# Altium PCB 12V SMPS.PcbDoc
Units mm, origin at the board's own origin, x right, y up, seen from the top; angles counter-clockwise.
Board outline 89 x 44 mm, 2 copper layers (Top Layer, Bottom Layer); 10 components, 8 nets, 28 pads, 0 vias.
Unrouted connection lines stored in the file: 19.
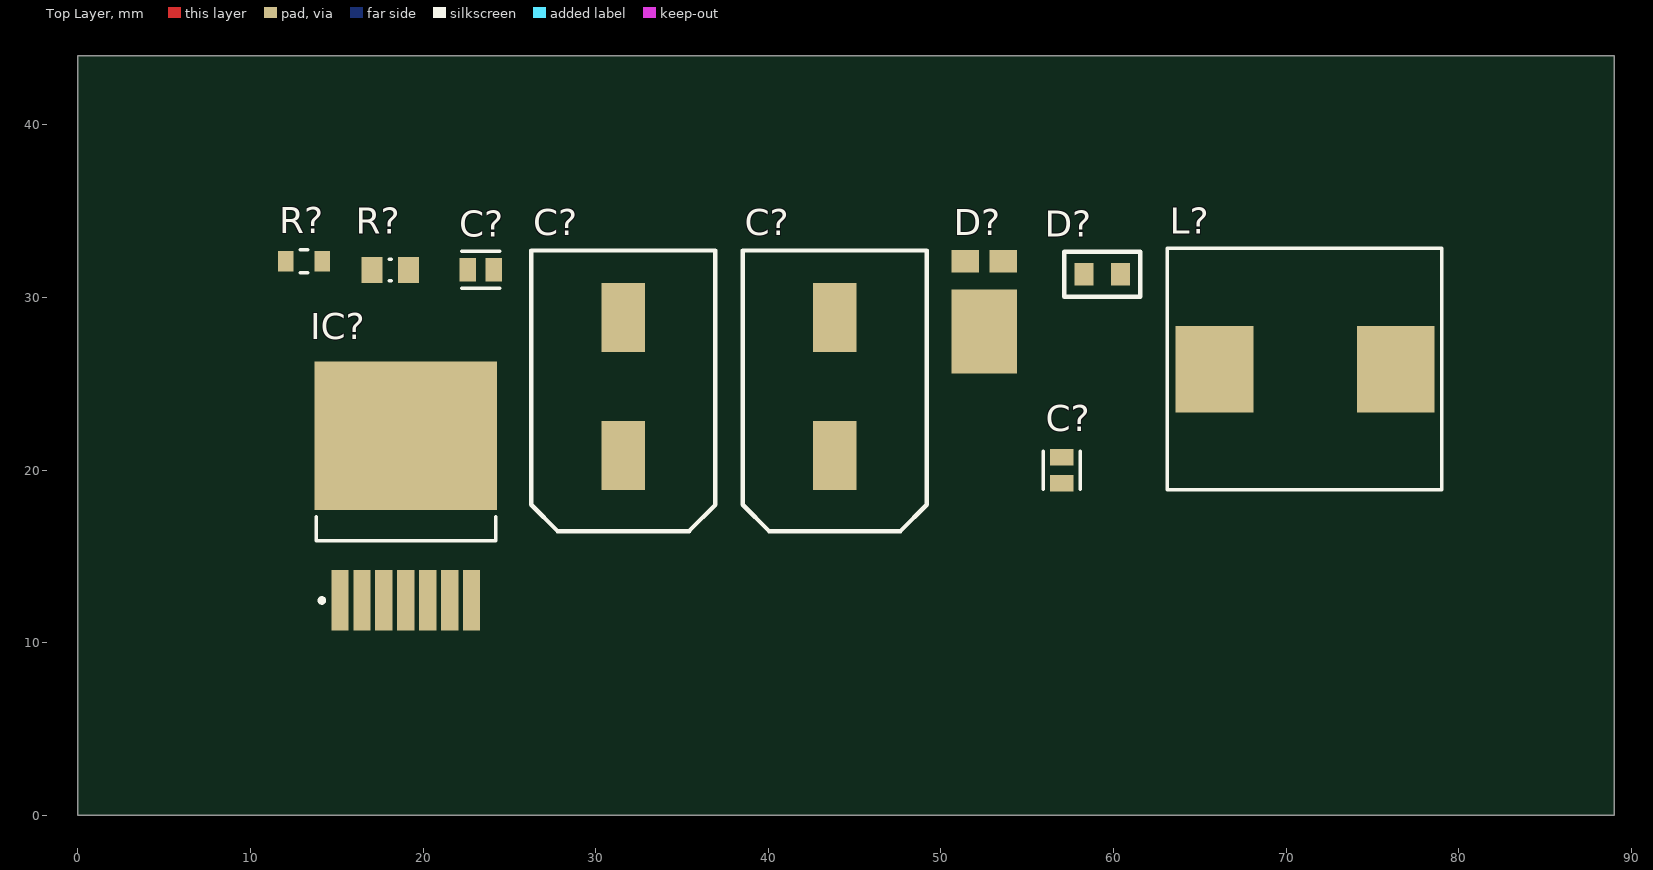
[diagram p0: Top Layer view]
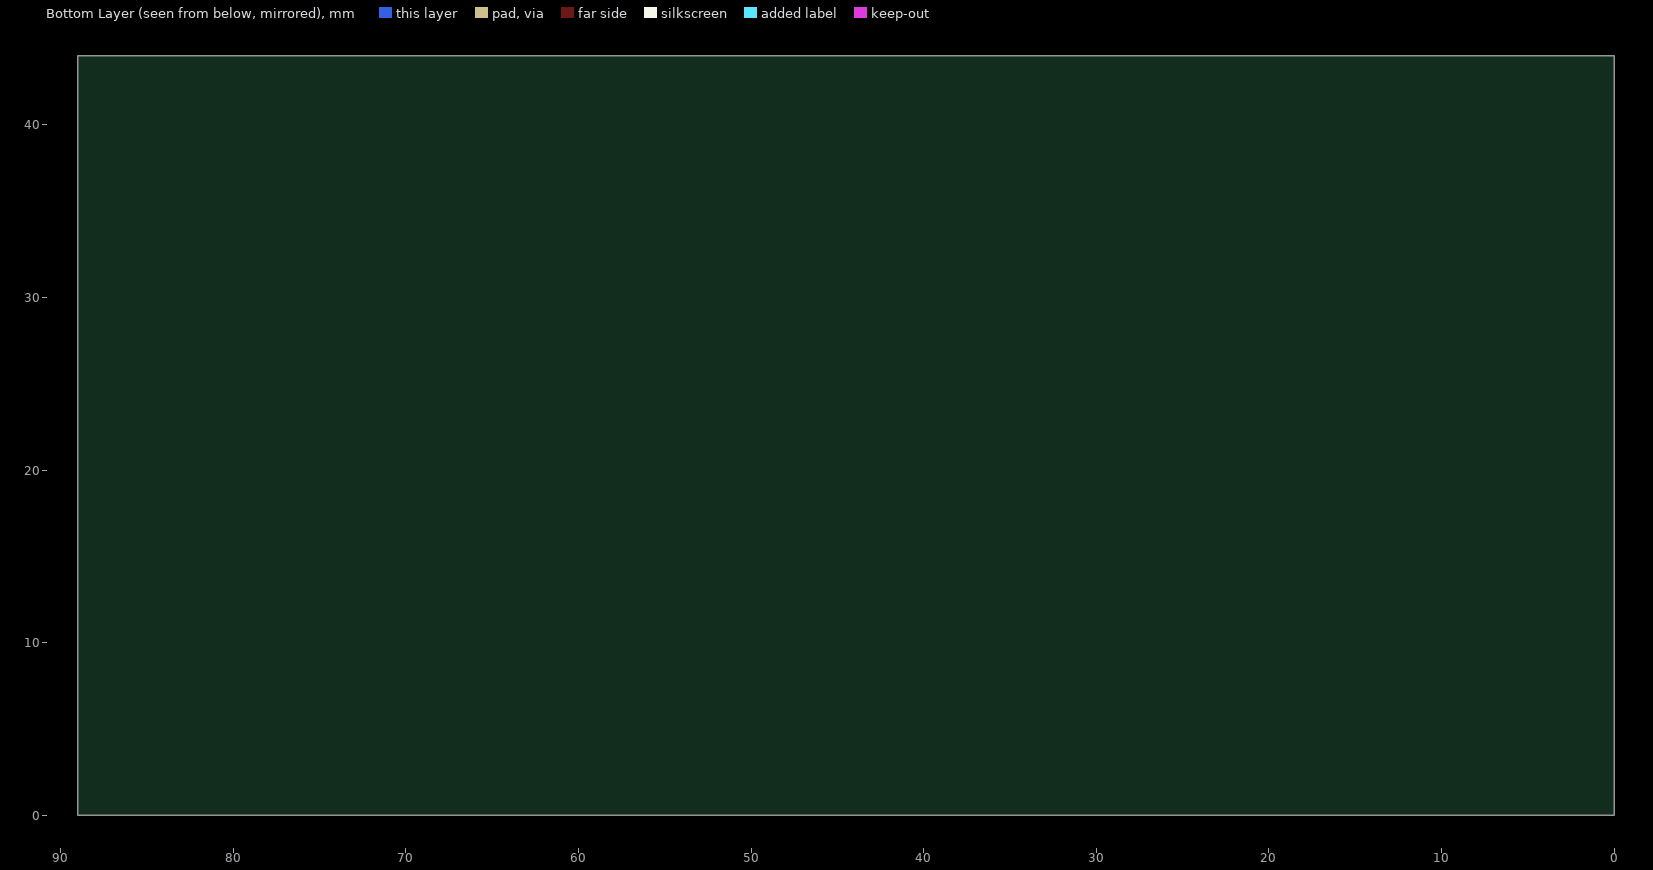
[diagram p1: Bottom Layer view, seen from below]

## Layer stack, top to bottom
Top Solder: solder mask 0.0102, Solder Resist, Dk 3.5
Top Layer: signal copper 0.0356
Dielectric 1: dielectric 0.32, FR-4, Dk 4.8
Bottom Layer: signal copper 0.0356
Bottom Solder: solder mask 0.0102, Solder Resist, Dk 3.5

## Board outline
0,0 89,0 89,44 0,44

## Design rules (kind name [scope] priority, off if disabled: settings)
Clearance [All] p1: gap=0.254 ignorepadtopadclearanceinfootprint=FALSE except(0: Arc-Hole Track-Hole SMDPad-Hole THPad-Hole Via-Hole Fill-Hole Poly-Hole Region-Hole Text-Hole)
PolygonConnect [All] p1: connectstyle=Relief reliefconductorwidth=0.254 reliefentries=4 polygonreliefangle="90 Angle" airgapwidth=0.254
RoutingVias [All] p1: holewidth=0.711 width=1.27 viastyle="Through Hole" minholewidth=0.711 minwidth=1.27 maxholewidth=0.711 maxwidth=1.27
SolderMaskExpansion [All] p1: expansion=0.102 istentingtop=FALSE
Width [All] p1: maxlimit=0.254 minlimit=0.254 preferedwidth=0.254
30 further rules are at their usual default settings.

## Classes and differential pairs
component class "12V SMPS": C? D? IC? L? R?

## Components (designator, comment, footprint, x,y, rotation, side; value= is the part's Value field where it differs from the comment)
C? "100uF" AHA1010101M040R 43.85,24.85 r90 top
C? "100uF" AHA1010101M040R 31.6,24.85 r90 top
C? "C0805C471J5GAC" FP-C0805C-DN-MFG 23.35,31.6 r0 top value="470 pF"
C? "C0805C103J5GAC" FP-C0805C-DN-MFG 57,20 r270 top value="10,000 pF"
D? "Schottky Diode" PMEG045V050EPE 50.6,25.6 r0 top
D? "0805 LED" "0805 LED" 59.35,31.35 r0 top
IC? "LM2679SX-12" TS7B_M 19,18.5 r90 top
L? "7443551331" "7443551331 33uH" 71.1,25.85 r0 top
R? "RT0805DRE07511RL" FP-RT0805-MFG 13.1,32.1 r0 top value=511Ω
R? "CRCW08055K60FKEA" FP-CRCW0805-e3-IPC_A 18.1,31.6 r0 top

## Footprints (in the part's own frame and the unit in brackets; to place one, negate y for a bottom-side part, rotate by r counter-clockwise, add the part's x,y. Pads: shape width x height; smd on the part's side, far side on the other; paste and mask are expansions set on the pad)
"0805 LED" [mm] "Wurth Electronics  / 150080VS75000"
  rect 1.1x1.3 smd: 1(-1.05,0) 2(1.05,0)
  round 1 on Top Overlay: ""(-3.1,-2)
  silkscreen extent -2.2,-1.3 2.2,1.3
"7443551331 33uH" [mm] "Wurth Electronics 7443551331 33uH"
  rect 4.5x5 smd: 1(-5.25,0) 2(5.25,0)
  silkscreen extent -8,-7 7.9,7
AHA1010101M040R [mm]
  rect 4x2.5 smd: 1(-4,0) 2(4,0)
  silkscreen extent -8.38,-5.33 7.87,5.33
FP-C0805C-DN-MFG [mm]
  rect 0.95x1.35 smd paste+0 mask+0: 1(-0.75,0) 2(0.75,0)
  silkscreen extent -1.1,-1.07 1.1,1.07, body extent -1.4,-0.85 1.4,0.85, height 0.25
FP-CRCW0805-e3-IPC_A [mil]
  rect 47.5x59.38 smd paste+0 mask+0: 1(-41.37,0) 2(41.37,0)
  silkscreen extent -3,-25 3,25, body extent -85,-49 85,49, height 10
FP-RT0805-MFG [mm]
  rect 0.9x1.2 smd paste+0 mask+0: 1(-1.05,0) 2(1.05,0)
  silkscreen extent -0.23,-0.67 0.23,0.67, body extent -1.6,-0.77 1.6,0.77, height 0.25
PMEG045V050EPE [mm]
  rect 1.6x1.3 smd: 1(0.8,6.5) 2(3,6.5)
  rect 3.8x4.85 smd: 3(1.9,2.425)
TS7B_M [mm] "D2-PAK, 8-Leads, Body 8.6x10.2mm, Pitch 1.27mm, Lead Span 14.1mm, IPC Low Density"
  rect 3.5x1 smd: 1(-6.05,3.81) 2(-6.05,2.54) 3(-6.05,1.27) 4(-6.05,0) 5(-6.05,-1.27) 6(-6.05,-2.54) 7(-6.05,-3.81)
  rect 8.6x10.55 smd: 8(3.5,0)
  silkscreen extent -6.17,-5.2 -1.2,5.2, body extent -2.6,-5.2 6.29,5.2, height 4.64

## Part data
C? C?: "Kyocera AHA1010101M040R"
C?: library part CMP-03020-010584-1, "C0805 470 pF C0G 30ppm/°C 5.00% 50 V", Capacitance="470 pF", Manufacturer=KEMET, Package=C0805C-DN, Temperature="-55°C to +125°C", Temperature Characteristic=C0G, Temperature Coefficient=30ppm/°C, Temperature Range High=+125°C, Temperature Range Low=-55°C, Tolerance=0.05, Voltage Rating="50 V", Automotive=No, Category=Cap, ComponentLink2Description=Datasheet, ComponentLink2URL=https://content.kemet.com/datasheets/KEM_C1003_C0G_SMD.pdf, Device Class L1="Passive Components", Device Class L2=Capacitors, Device Class L3="Ceramic Capacitors", Height=0.88mm, Ipc Land Pattern Name=CAPC200125X78, Lead Free=Yes, Manufacturer Part Number=C0805C471J5GAC, Material=Ceramic, Mouser Description="Multilayer Ceramic Capacitors MLCC - SMD/SMT 50volts 470pF 5% C0G", Octopart=https://octopart.com/c0805c471j5gac-kemet-1364888, RoHS=TRUE
C?: library part CMP-03020-003256-1, "C0805 10,000 pF C0G 30ppm/°C 5.00% 50 V", Capacitance="10,000 pF", Manufacturer=KEMET, Package=C0805C-DN, Temperature="-55°C to +125°C", Temperature Characteristic=C0G, Temperature Coefficient=30ppm/°C, Temperature Range High=+125°C, Temperature Range Low=-55°C, Tolerance=0.05, Voltage Rating="50 V", Automotive=No, Category=Cap, ComponentLink2Description=Datasheet, ComponentLink2URL=https://content.kemet.com/datasheets/KEM_C1003_C0G_SMD.pdf, Device Class L1="Passive Components", Device Class L2=Capacitors, Device Class L3="Ceramic Capacitors", Height=0.88mm, Ipc Land Pattern Name=CAPC200125X78, Lead Free=Yes, Manufacturer Part Number=C0805C103J5GAC, Material=Ceramic, Mouser Description="Multilayer Ceramic Capacitors MLCC - SMD/SMT 50volts 0.01uF 5% C0G", Octopart=https://octopart.com/c0805c103j5gac-kemet-22233108, RoHS=TRUE
D?: library part PMEG045V050EPEZ, "PMEG045V050EPEZ"
D?: "Wurth Electronics 150080VS75000"
IC?: "LM2679SX-12/NOPB"
L?: "Wurth Electronics 7443551331"
R?: library part CMP-03412-001492-1, "RES SMD 511 OHM 0.5% 1/8W 0805", Manufacturer=Yageo, Package=RT0805, Power Rating=0.125W, Resistance=511Ω, Temperature="-55°C to +155°C", Temperature Coefficient="50 ppm/°C", Temperature Range High=+155°C, Temperature Range Low=-55°C, Tolerance=0.01, Voltage Rating=150V, Automotive=No, Category=Res, ComponentLink2Description=Datasheet, ComponentLink2URL=http://www.yageo.com/documents/recent/PYu-RT_1-to-0.01_RoHS_L_9.pdf, Composition="Thin Film", Device Class L1="Passive Components", Device Class L2=Resistors, Device Class L3="Chip SMD Resistors", Digikey Description="RES SMD 511 OHM 0.5% 1/8W 0805", Footprint Url=http://www.yageo.com/exep/pages/download/literatures/PYu-R_Mount_10.pdf, Height=0.6mm, Ipc Land Pattern Name=RESC200125X50, Lead Free=Yes, Manufacturer Part Number=RT0805DRE07511RL, Octopart=https://octopart.com/rt0805dre07511rl-yageo-1369364, RoHS=TRUE, Series=RT
R?: library part CMP-2001-04030-2, "RES Thick Film, 5.6kΩ, 1%, 0.125W, 100ppm/°C, 0805", Case Code (Imperial)=0805, Case Code (Metric)=2012, Max Operating Temperature=155°C, Max Power Dissipation=125mW, Min Operating Temperature=-55°C, Package Quantity=1, Resistance=5.6kR, Temperature Coefficient=100ppm/°C, Tolerance=1%, Voltage Rating=150V, Case/Package=0805, Composition="Thick Film", Contact Plating=Tin, Depth=1.25mm, Features="Automotive AEC-Q200", Height=0.45mm, Lead Free="Lead Free", Length=2mm, Military Standard=Not, Mount="Surface Mount", Number of Pins=2, Number of Terminations=2, Packaging="Tape and Reel", Power Rating=125mW, Radiation Hardening=No, Termination=SMD/SMT, Voltage Rating (DC)=150V, Weight=0.000194oz, Width=1.25mm

## Nets (pads, with @x,y where several pads share a name; then routed paths per layer and width w, separated by ;. In a path a pad name is that pad's centre, name@x,y a point inside that pad or via, vN(x,y) a via of type N, cw(c..) or ccw(c..) an arc to the next point about the centre after c; other vN are vias at no path point)
+24VIN: C?.1@31.6,20.85 IC?.2
BOOST: C?.2@57,19.25 IC?.3
CURRENT_ADJ: IC?.5 R?.2@19.15,31.6
FEEDBACK: C?.1@43.85,20.85 D?.1@58.3,31.35 IC?.6 L?.2
GND: C?.2@24.1,31.6 C?.2@31.6,28.85 C?.2@43.85,28.85 D?.1@51.4,32.1 D?.2@53.6,32.1 IC?.4 IC?.8 R?.1
NetD?_2: D?.2@60.4,31.35 R?.2@14.15,32.1
SOFTSTART: C?.1@22.6,31.6 IC?.7
SW_NODE: C?.1@57,20.75 D?.3 IC?.1 L?.1
pads on no net: D?.